# Altium PCB PCB1.PcbDoc
Units mm, origin at the board's own origin, x right, y up, seen from the top; angles counter-clockwise.
Board outline 15.15 x 100.75 mm, 2 copper layers (Top Layer, Bottom Layer), stack 1.571 mm thick; 28 components, 30 nets, 128 pads, 40 vias.
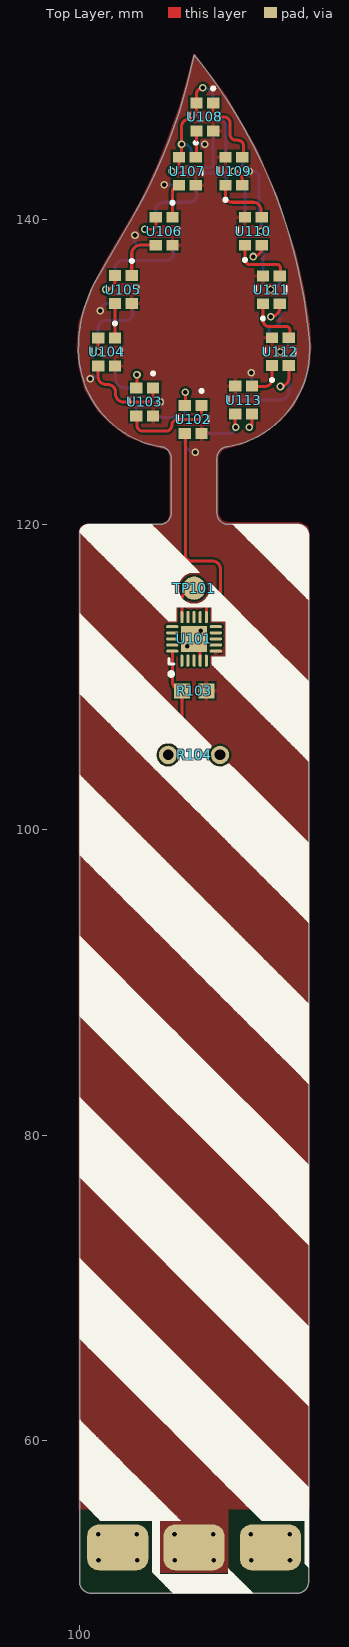
[diagram p0: Top Layer view]
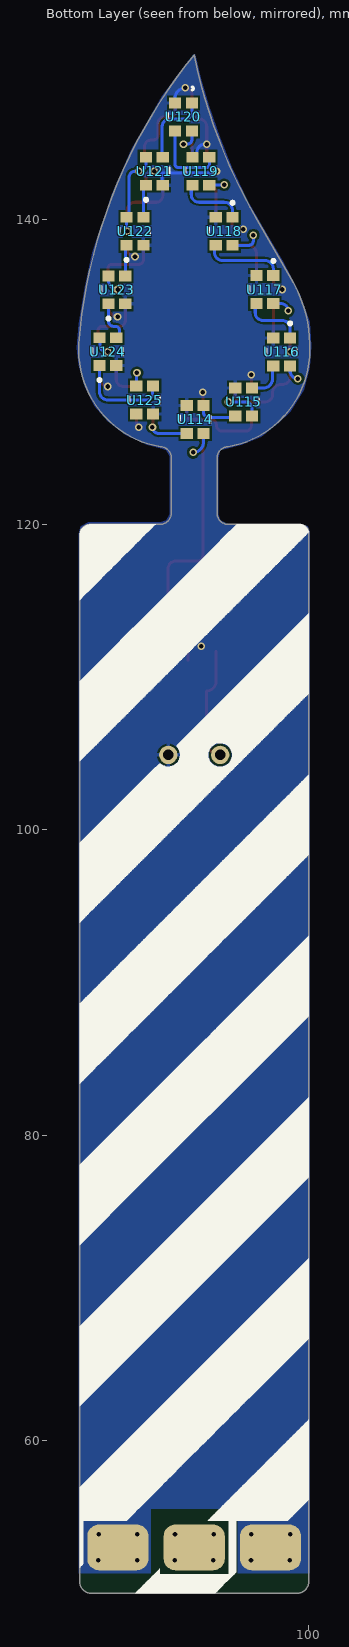
[diagram p1: Bottom Layer view, seen from below]
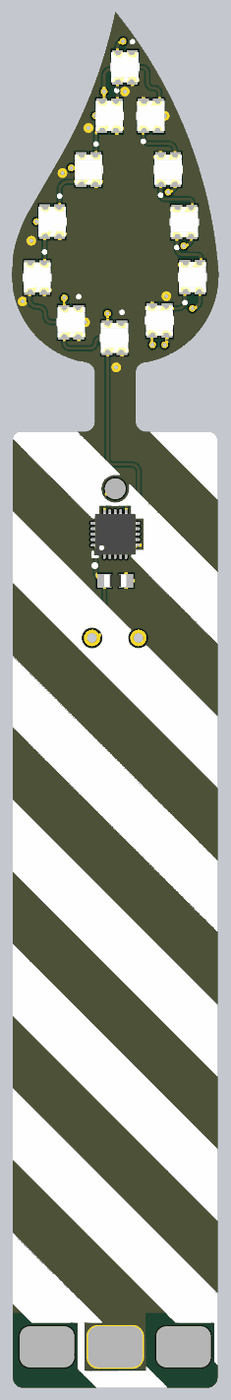
[diagram p2: 3D render of the assembled board from above, using the file's embedded part models]
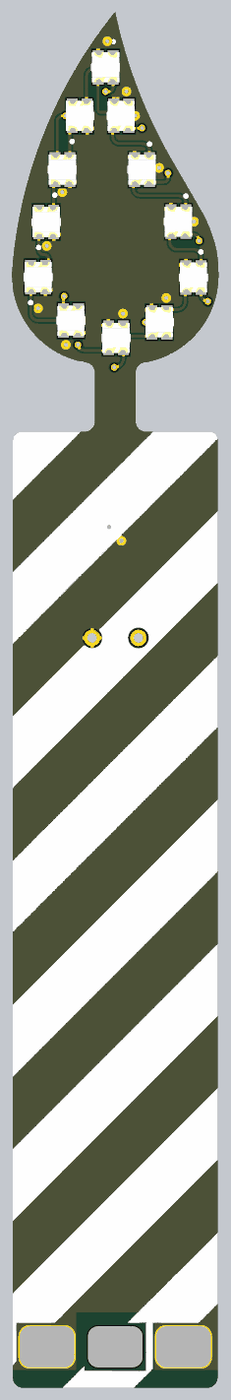
[diagram p3: 3D render of the assembled board from below, using the file's embedded part models]

## Layer stack, top to bottom
Top Solder: solder mask 0.0102, Solder Resist, Dk 3.5
Top Layer: signal copper 0.0356
Dielectric 1: dielectric 1.5, FR-4, Dk 4.8
Bottom Layer: signal copper 0.0356
Bottom Solder: solder mask 0.0102, Solder Resist, Dk 3.5

## Board outline
100,50.749 100,119.431 cw(c100.569,119.431) 100.569,120 105.268,120 ccw(c105.268,120.732) 106,120.732 106,124.333 ccw(c105.265,124.349) 105.281,125.083 cw(c106.382,131.444) 99.938,131.826 cw(c107.442,131.826) 100.466,134.592 cw(c108.712,131.826) 101.005,135.857 103.373,139.935 ccw(c72.009,158.115) 107.506,150.753 cw(c80.899,129.159) 115.062,131.826 cw(c108.618,131.444) 109.709,125.081 ccw(c109.729,124.353) 109,124.333 109,120.743 ccw(c109.743,120.743) 109.743,120 114.315,120 cw(c114.315,119.315) 115,119.315 115,50.738 cw(c114.262,50.738) 114.262,50 100.749,50 cw(c100.749,50.749)

## Design rules (kind name [scope] priority, off if disabled: settings)
Clearance [All] p1: gap=0.127 ignorepadtopadclearanceinfootprint=TRUE except(0.254: Arc-Hole Track-Hole SMDPad-Hole THPad-THPad THPad-Hole Via-Via Via-Hole Fill-Hole Poly-Hole Region-Hole Text-Hole)
PolygonConnect PolygonConnect_VIA [All vs IsVia or InUnion(2)] p1: connectstyle=Direct reliefconductorwidth=0.254 reliefentries=4 polygonreliefangle="90 Angle" airgapwidth=0.127
PolygonConnect [All] p2: connectstyle=Relief reliefconductorwidth=0.254 reliefentries=4 polygonreliefangle="90 Angle" airgapwidth=0.127
RoutingVias [All] p1: holewidth=0.3 width=0.5 viastyle="Through Hole" minholewidth=0.3 minwidth=0.5 maxholewidth=2539.975 maxwidth=2539.975
SolderMaskExpansion SolderMaskExpansion_VIA [IsVia] p1: expansion=-100 istentingtop=FALSE
SolderMaskExpansion [All] p2: expansion=0.102 istentingtop=FALSE
SupplyNets "Schematic Supply Nets_1" [InNet('GND')] p1: voltage=0.000
SupplyNets "Schematic Supply Nets" [InNet('+5')] p2: voltage=0.000
Width [All] p1: maxlimit=254 minlimit=0.127 preferedwidth=0.2
30 further rules are at their usual default settings.

## Components (designator, comment, footprint, x,y, rotation, side; value= is the part's Value field where it differs from the comment)
R103 "Resistor" RESC1608X06N 107.5,109.093 r0 top
R104 "Photoconductive Resistor" LDR_5016 109.2,104.902 r180 top
TP101 "TestPoint" TestPoint 107.442,115.824 r90 top
U101 "CH32V003" QFN40P300X300X75_HS-21N 107.5,112.5 r90 top
U102 "NOT COMPATIBLE WITH WS2812B" LED_WS2812-2020 107.442,126.873 r90 top
U103 "NOT COMPATIBLE WITH WS2812B" LED_WS2812-2020 104.267,128.016 r90 top
U104 "NOT COMPATIBLE WITH WS2812B" LED_WS2812-2020 101.769,131.292 r90 top
U105 "NOT COMPATIBLE WITH WS2812B" LED_WS2812-2020 102.87,135.382 r90 top
U106 "NOT COMPATIBLE WITH WS2812B" LED_WS2812-2020 105.537,139.192 r90 top
U107 "NOT COMPATIBLE WITH WS2812B" LED_WS2812-2020 107.061,143.129 r90 top
U108 "NOT COMPATIBLE WITH WS2812B" LED_WS2812-2020 108.204,146.685 r90 top
U109 "NOT COMPATIBLE WITH WS2812B" LED_WS2812-2020 110.109,143.129 r270 top
U110 "NOT COMPATIBLE WITH WS2812B" LED_WS2812-2020 111.379,139.192 r270 top
U111 "NOT COMPATIBLE WITH WS2812B" LED_WS2812-2020 112.564,135.356 r270 top
U112 "NOT COMPATIBLE WITH WS2812B" LED_WS2812-2020 113.157,131.318 r270 top
U113 "NOT COMPATIBLE WITH WS2812B" LED_WS2812-2020 110.744,128.143 r270 top
U114 "NOT COMPATIBLE WITH WS2812B" LED_WS2812-2020 107.442,126.873 r90 bottom
U115 "NOT COMPATIBLE WITH WS2812B" LED_WS2812-2020 104.267,128.016 r90 bottom
U116 "NOT COMPATIBLE WITH WS2812B" LED_WS2812-2020 101.769,131.292 r90 bottom
U117 "NOT COMPATIBLE WITH WS2812B" LED_WS2812-2020 102.87,135.382 r90 bottom
U118 "NOT COMPATIBLE WITH WS2812B" LED_WS2812-2020 105.537,139.192 r90 bottom
U119 "NOT COMPATIBLE WITH WS2812B" LED_WS2812-2020 107.061,143.129 r90 bottom
U120 "NOT COMPATIBLE WITH WS2812B" LED_WS2812-2020 108.204,146.685 r90 bottom
U121 "NOT COMPATIBLE WITH WS2812B" LED_WS2812-2020 110.109,143.129 r270 bottom
U122 "NOT COMPATIBLE WITH WS2812B" LED_WS2812-2020 111.379,139.192 r270 bottom
U123 "NOT COMPATIBLE WITH WS2812B" LED_WS2812-2020 112.564,135.356 r270 bottom
U124 "NOT COMPATIBLE WITH WS2812B" LED_WS2812-2020 113.157,131.318 r270 bottom
U125 "NOT COMPATIBLE WITH WS2812B" LED_WS2812-2020 110.744,128.143 r270 bottom

## Footprints (in the part's own frame and the unit in brackets; to place one, negate y for a bottom-side part, rotate by r counter-clockwise, add the part's x,y. Pads: shape width x height; smd on the part's side, far side on the other; paste and mask are expansions set on the pad)
LDR_5016 [mm]
  round 1.2 hole 0.7: 1(0,0) 2(3.4,0)
  body extent -0.85,-2.55 4.25,2.55, height 1.8
LED_WS2812-2020 [mm]
  rect 0.7x0.8 smd: 1(0.915,-0.55) 2(0.915,0.55) 3(-0.915,0.55) 4(-0.915,-0.55)
  silkscreen extent -0.25,-1 1.97,1, body extent -1.1,-1 1.1,1, height 0.84
QFN40P300X300X75_HS-21N [mm] "QFN, 20-Leads, Body 3,00x3,00mm, Pitch 0,40mm, Thermal Pad 1,70x1,70mm, IPC Medium Density"
  rect 1.7x1.7 smd: 0(0,0)
  oval 0.8x0.2 smd: 1(-1.425,0.8) 2(-1.425,0.4) 3(-1.425,0) 4(-1.425,-0.4) 5(-1.425,-0.8) 11(1.425,-0.8) 12(1.425,-0.4) 13(1.425,0) 14(1.425,0.4) 15(1.425,0.8)
  oval 0.2x0.8 smd: 6(-0.8,-1.425) 7(-0.4,-1.425) 8(0,-1.425) 9(0.4,-1.425) 10(0.8,-1.425) 16(0.8,1.425) 17(0.4,1.425) 18(0,1.425) 19(-0.4,1.425) 20(-0.8,1.425)
  silkscreen extent -2.42,-1.65 1.65,1.65, body extent -1.53,-1.53 1.53,1.53, height 0.75
RESC1608X06N [mm] "Chip Resistor, 2-Leads, Body 1,55x0,85mm, IPC Medium Density"
  rect 1.05x1 smd: 1(-0.8,0) 2(0.8,0)
  body extent -0.8,-0.45 0.8,0.45, height 0.6
TestPoint [mil]
  round 60 smd: TP(0,-2.28)

## Part data
R103: library part R0603
R104: library part LDR
U101: library part CH32V003F4U6, "CH32V003 series is an industrial-grade general-purpose microcontroller designed based on QingKe RISC-V2A / core, which supports 48MHz system main frequency in the product function"
U102 U103 U104 U105 U106 U107 U108 U109 U110 U111 U112 U113 U114 U115 U116 U117 U118 U119 U120 U121 U122 U123 U124 U125: library part WS2812_2018, "Adressable RGB LED"

## Free pads (board coordinates)
  rrect50% 4x3 smd: 2(102.5,53) 3(107.5,53) 4(112.5,53)
  rrect50% 4x3 smd far side: 2(102.5,53) 3(107.5,53) 4(112.5,53)

## Via types
v1: diameter 0.5, hole 0.3, Top Layer to Bottom Layer, 40 vias

## Nets (pads, with @x,y where several pads share a name; then routed paths per layer and width w, separated by ;. In a path a pad name is that pad's centre, name@x,y a point inside that pad or via, vN(x,y) a via of type N, cw(c..) or ccw(c..) an arc to the next point about the centre after c; other vN are vias at no path point)
+5: pad.3 R103.2 U101.6 U102.4 U103.4 U104.4 U105.4 U106.4 U107.4 U108.4 U109.4 U110.4 U111.4 U112.4 U113.4 U114.4 U115.4 U116.4 U117.4 U118.4 U119.4 U120.4 U121.4 U122.4 U123.4 U124.4 U125.4 | length 19.6
  Bottom Layer w0.2: v1(100.711,129.54) ccw(c100.711,130.048) 101.219,130.048 U116.4 ; v1(101.346,133.985) cw(c101.828,133.985) 101.828,134.467 U117.4 ; v1(103.632,138.938) 103.632,138.557 ccw(c103.912,138.557) 103.912,138.277 U118.4 ; U115.4 103.717,127.593 cw(c104.14,127.593) 104.14,128.016 v1(105.283,128.016) ; v1(105.537,142.24) ccw(c105.563,142.24) 105.563,142.214 U119.4 ; U114.4 106.892,125.391 ccw(c107.569,125.391) v1(107.569,124.714) ; U120.4 107.654,145.203 ccw(c107.95,145.203) 107.95,144.907 v1(108.204,144.907) ; U121.4 110.659,143.595 ccw(c111.125,143.595) v1(111.125,143.129) 111.379,143.129 cw(c111.379,142.748) 111.76,142.748 111.76,140.276 ccw(c111.929,140.276) U122.4 111.929,139.234 cw(c111.887,139.234) v1(111.887,139.192) ; v1(111.252,129.921) cw(c111.252,129.879) 111.294,129.879 U125.4 ; v1(112.522,135.382) ccw(c112.522,135.974) 113.114,135.974 U123.4 ; v1(113.157,131.318) 113.284,131.318 ccw(c113.284,131.699) 113.665,131.699 113.665,132.191 cw(c113.707,132.191) U124.4
  other v1: 106.241,52.152 108.781,52.152 106.219,53.848 108.759,53.848
CC1: 
CC2: 
GND: pad.2 pad.4 R104.1 U101.0 U101.4 U102.2 U103.2 U104.2 U105.2 U106.2 U107.2 U108.2 U109.2 U110.2 U111.2 U112.2 U113.2 U114.2 U115.2 U116.2 U117.2 U118.2 U119.2 U120.2 U121.2 U122.2 U123.2 U124.2 U125.2 | length 26.9
  Top Layer w0.2: v1(101.219,131.318) U104.2 ; v1(101.727,135.382) ccw(c101.727,135.975) 102.32,135.975 U105.2 ; U103.2 ccw(c103.717,128.973) 103.759,128.973 v1(103.759,129.794) ; v1(104.283,139.319) 104.798,139.35 ccw(c104.769,139.596) 105.017,139.588 105.017,139.592 105.017,139.598 105.017,139.603 105.002,139.857 U106.2 ; v1(106.045,143.129) ccw(c106.045,143.595) 106.511,143.595 U107.2 ccw(c106.511,144.213) 106.68,144.213 v1(106.68,144.907) 106.68,146.05 cw(c107.188,146.05) 107.188,146.558 ccw(c107.188,147.024) 107.654,147.024 U108.2 107.654,148.167 cw(c108.077,148.167) v1(108.077,148.59) ; U102.2 ccw(c106.892,127.83) 106.934,127.83 v1(106.934,128.651) ; U101.0 107.9,112.1 U101.4 ; v1(110.109,143.129) cw(c110.109,142.579) 110.659,142.579 U109.2 ; v1(111.125,126.365) ccw(c111.125,126.534) 111.294,126.534 U113.2 ; v1(111.379,137.541) ccw(c111.379,138.091) 111.929,138.091 U110.2 ; v1(112.522,133.604) ccw(c112.522,134.196) 113.114,134.196 U111.2 ; v1(113.157,129.032) ccw(c113.157,129.582) 113.707,129.582 U112.2
  Bottom Layer w0.2: v1(106.045,143.129) ccw(c106.172,143.129) 106.172,143.002 109.601,143.002 ; v1(106.68,144.907) 106.807,144.907 cw(c106.807,144.399) 107.315,144.399 ; v1(108.077,148.59) cw(c108.077,147.913) 108.754,147.913 U120.2 ; U121.2 ccw(c109.559,142.256) 109.601,142.256 109.601,143.002 ; v1(110.109,143.129) cw(c109.982,143.129) 109.982,143.002 109.601,143.002
  other v1: 101.241,52.152 103.781,52.152 111.241,52.152 113.781,52.152 101.219,53.848 103.759,53.848 111.219,53.848 113.759,53.848 107.05,112.014 107.95,113.03
LED_DI: U101.11 U102.3 | length 14.5
  Top Layer w0.2: U102.3 cw(c106.892,125.916) 106.934,125.916 106.934,117.983 ccw(c107.315,117.983) 107.315,117.602 108.712,117.602 cw(c108.712,117.094) 109.22,117.094 109.22,115.316 cw(c108.712,115.316) 108.712,114.808 ccw(c108.712,114.396) 108.3,114.396 U101.11
NetR103_1: R103.1 R104.2 U101.20 | length 7.7
  Top Layer w0.2: R104.2 ccw(c105.8,105.802) 106.7,105.802 R103.1 cw(c106.7,109.718) 106.075,109.718 U101.20
NetTP101_TP: TP101.TP U101.15 | length 2.4
  Top Layer w0.2: U101.15 106.7,115.024 cw(c107.5,115.024) TP101.TP
NetU102_1: U102.1 U103.3 | length 6.3
  Top Layer w0.2: U103.3 cw(c103.717,127.059) 103.759,127.059 103.759,126.492 ccw(c104.14,126.492) 104.14,126.111 105.664,126.111 ccw(c105.664,126.492) 106.045,126.492 cw(c106.426,126.492) 106.426,126.873 107.696,126.873 ccw(c107.696,127.169) 107.992,127.169 U102.1
NetU103_1: U103.1 U104.3 | length 6
  Top Layer w0.2: U104.3 101.219,129.667 ccw(c101.727,129.667) 101.727,129.159 101.854,129.159 cw(c101.854,128.651) 102.362,128.651 102.362,128.524 ccw(c102.87,128.524) 102.87,128.016 104.394,128.016 ccw(c104.394,128.439) 104.817,128.439 U103.1
NetU104_1: U104.1 U105.3 | length 2.3
  Top Layer w0.2: U104.1 U105.3
NetU105_1: U105.1 U106.3 | length 3.3
  Top Layer w0.2: U105.1 103.42,137.71 cw(c104.013,137.71) 104.013,138.303 104.961,138.303 cw(c104.961,138.277) U106.3
NetU106_1: U106.1 U107.3 | length 2.3
  Top Layer w0.2: U106.1 106.087,141.79 cw(c106.511,141.79) U107.3
NetU107_1: U107.1 U108.3 | length 1.8
  Top Layer w0.2: U107.1 ccw(c107.611,144.087) 107.654,144.087 U108.3
NetU108_1: U108.1 U109.3 | length 5
  Top Layer w0.2: U108.1 108.754,147.024 ccw(c109.093,147.024) 109.093,146.685 109.474,146.685 cw(c109.474,146.304) 109.855,146.304 109.855,145.542 ccw(c110.236,145.542) 110.236,145.161 110.363,145.161 cw(c110.363,144.78) 110.744,144.78 110.744,144.129 cw(c110.659,144.129) U109.3
NetU109_1: U109.1 U110.3 | length 4.1
  Top Layer w0.2: U109.1 109.559,141.52 ccw(c109.982,141.52) 109.982,141.097 111.379,141.097 cw(c111.379,140.589) 111.887,140.589 111.887,140.149 ccw(c111.929,140.149) U110.3
NetU110_1: U110.1 U111.3 | length 4.1
  Top Layer w0.2: U110.1 110.829,137.329 ccw(c111.125,137.329) 111.125,137.033 112.903,137.033 cw(c112.903,136.779) 113.157,136.779 113.157,136.314 cw(c113.114,136.314) U111.3
NetU111_1: U111.1 U112.3 | length 3.8
  Top Layer w0.2: U111.1 112.014,133.35 ccw(c112.395,133.35) 112.395,132.969 113.538,132.969 cw(c113.538,132.715) 113.792,132.715 113.792,132.318 cw(c113.707,132.318) U112.3
NetU112_1: U112.1 U113.3 | length 2.5
  Top Layer w0.2: U113.3 ccw(c111.32,129.058) 111.32,129.032 112.141,129.032 ccw(c112.141,129.498) 112.607,129.498 U112.1
NetU113_1: U113.1 U114.3 | length 3.4
  Top Layer w0.2: U113.1 110.194,126.407 ccw(c110.236,126.407) v1(110.236,126.365)
  Bottom Layer w0.2: U114.3 109.829,125.958 ccw(c109.829,126.365) v1(110.236,126.365)
NetU114_1: U114.1 U115.3 | length 2.8
  Bottom Layer w0.2: U115.3 ccw(c104.918,127.101) 104.918,127 106.553,127 ccw(c106.553,127.339) 106.892,127.339 U114.1
NetU115_1: U115.1 U116.3 | length 2.6
  Bottom Layer w0.2: U116.3 cw(c102.319,130.334) 102.362,130.334 102.362,129.54 ccw(c102.971,129.54) 102.971,128.931 U115.1
NetU116_1: U116.1 U117.3 | length 4.2
  Bottom Layer w0.2: U116.1 101.219,132.842 cw(c101.727,132.842) 101.727,133.35 102.997,133.35 ccw(c102.997,133.858) 103.505,133.858 103.505,134.382 ccw(c103.42,134.382) U117.3
NetU117_1: U117.1 U118.3 | length 5.4
  Bottom Layer w0.2: U117.1 102.32,136.737 cw(c102.87,136.737) 102.87,137.287 105.664,137.287 ccw(c105.664,137.795) 106.172,137.795 106.172,138.192 ccw(c106.087,138.192) U118.3
NetU118_1: U118.1 U119.3 | length 4.4
  Bottom Layer w0.2: U118.1 104.987,140.547 cw(c105.537,140.547) 105.537,141.097 107.188,141.097 ccw(c107.188,141.605) 107.696,141.605 107.696,142.129 ccw(c107.611,142.129) U119.3
NetU119_1: U119.1 U120.3 | length 5.1
  Bottom Layer w0.2: U119.1 106.511,143.552 ccw(c106.68,143.552) 106.68,143.383 108.585,143.383 ccw(c108.585,143.552) 108.65,143.396 108.741,143.487 ccw(c108.585,143.552) 108.754,143.552 U120.3
NetU120_1: U120.1 U121.3 | length 5.1
  Bottom Layer w0.2: U120.1 107.654,146.981 ccw(c108.077,146.981) 108.077,146.558 109.093,146.558 cw(c109.093,146.05) 109.601,146.05 109.601,144.086 cw(c109.559,144.086) U121.3
NetU121_1: U121.1 U122.3 | length 2.2
  Bottom Layer w0.2: U121.1 cw(c110.659,142.044) 110.829,142.044 U122.3
NetU122_1: U122.1 U123.3 | length 2.1
  Bottom Layer w0.2: U122.1 cw(c111.929,138.192) 112.014,138.192 U123.3
NetU123_1: U123.1 U124.3 | length 2.8
  Bottom Layer w0.2: U124.3 cw(c112.607,132.445) 112.395,132.445 112.395,132.715 cw(c112.649,132.715) 112.649,132.969 112.776,132.969 ccw(c112.776,133.307) 113.114,133.307 U123.1
NetU124_1: U124.1 U125.3 | length 6.3
  Bottom Layer w0.2: U125.3 cw(c110.194,129.016) 110.236,129.016 110.236,128.524 ccw(c110.617,128.524) 110.617,128.143 113.157,128.143 ccw(c113.157,128.693) 113.707,128.693 U124.1
pads on no net: U101.1 U101.2 U101.3 U101.5 U101.7 U101.8 U101.9 U101.10 U101.12 U101.13 U101.14 U101.16 U101.17 U101.18 U101.19 U125.1

## Polygon pours and split planes (outlines as drawn)
GND on Bottom Layer "GND_L02_P002" (solid, pour order 2): 107.442,150.749 107.061,149.225 106.553,147.447 105.791,145.288 105.029,143.383 104.013,141.224 102.997,139.446 101.727,137.287 100.711,135.382 100.33,134.366 99.949,133.223 99.822,131.699 99.949,130.302 100.33,128.778 101.219,127.381 101.981,126.619 103.124,125.73 104.394,125.222 105.41,124.968 105.791,124.841 105.918,124.333 105.918,120.65 105.791,120.269 105.283,120.015 100.457,120.015 100.076,119.888 99.949,119.507 99.949,51.308 104.648,51.308 104.648,55.523 110.363,55.523 110.363,51.308 115.062,51.308 115.062,119.38 114.935,119.888 114.427,120.142 109.728,120.142 109.347,120.269 109.093,120.65 109.093,124.46 109.347,124.841 109.601,124.968 110.617,125.222 112.014,125.857 113.157,126.746 114.046,127.762 114.681,129.032 115.062,130.429 115.189,131.572 115.062,133.096 114.681,135.509 114.173,137.795 112.903,141.605 111.633,144.526 109.601,148.082 107.569,150.749
+5 on Top Layer "+5_L01_P001" (solid, pour order 1): 107.442,150.749 107.061,149.225 106.553,147.447 105.791,145.288 105.029,143.383 104.013,141.224 102.997,139.446 101.727,137.287 100.711,135.382 100.33,134.366 99.949,133.223 99.822,131.699 99.949,130.302 100.33,128.778 101.219,127.381 101.981,126.619 103.124,125.73 104.394,125.222 105.41,124.968 105.791,124.841 105.918,124.333 105.918,120.65 105.791,120.269 105.283,120.015 100.457,120.015 100.076,119.888 99.949,119.507 99.949,55.499 105.283,55.499 105.283,51.338 109.743,51.338 109.728,55.499 115.062,55.499 115.062,119.38 114.935,119.888 114.427,120.142 109.728,120.142 109.347,120.269 109.093,120.65 109.093,124.46 109.347,124.841 109.601,124.968 110.617,125.222 112.014,125.857 113.157,126.746 114.046,127.762 114.681,129.032 115.062,130.429 115.189,131.572 115.062,133.096 114.681,135.509 114.173,137.795 112.903,141.605 111.633,144.526 109.601,148.082 107.569,150.749
no net on Bottom Overlay "NONET_L-01_P-001" (solid): 107.405,112.073 107.026,112.453 107.061,114.554 108.712,114.681 108.712,112.014

## Silkscreen, mask and mechanical layers (free items; w line width, h text height)
Top Overlay:
  drawing of 31 lines, arcs and shapes, not listed
Bottom Overlay:
  drawing of 24 lines, arcs and shapes, not listed
Mechanical 1:
  the board outline again, w0.254